# EAGLE board LilyPad_XBee-Panel-v10 (EAGLE 6.5.0)
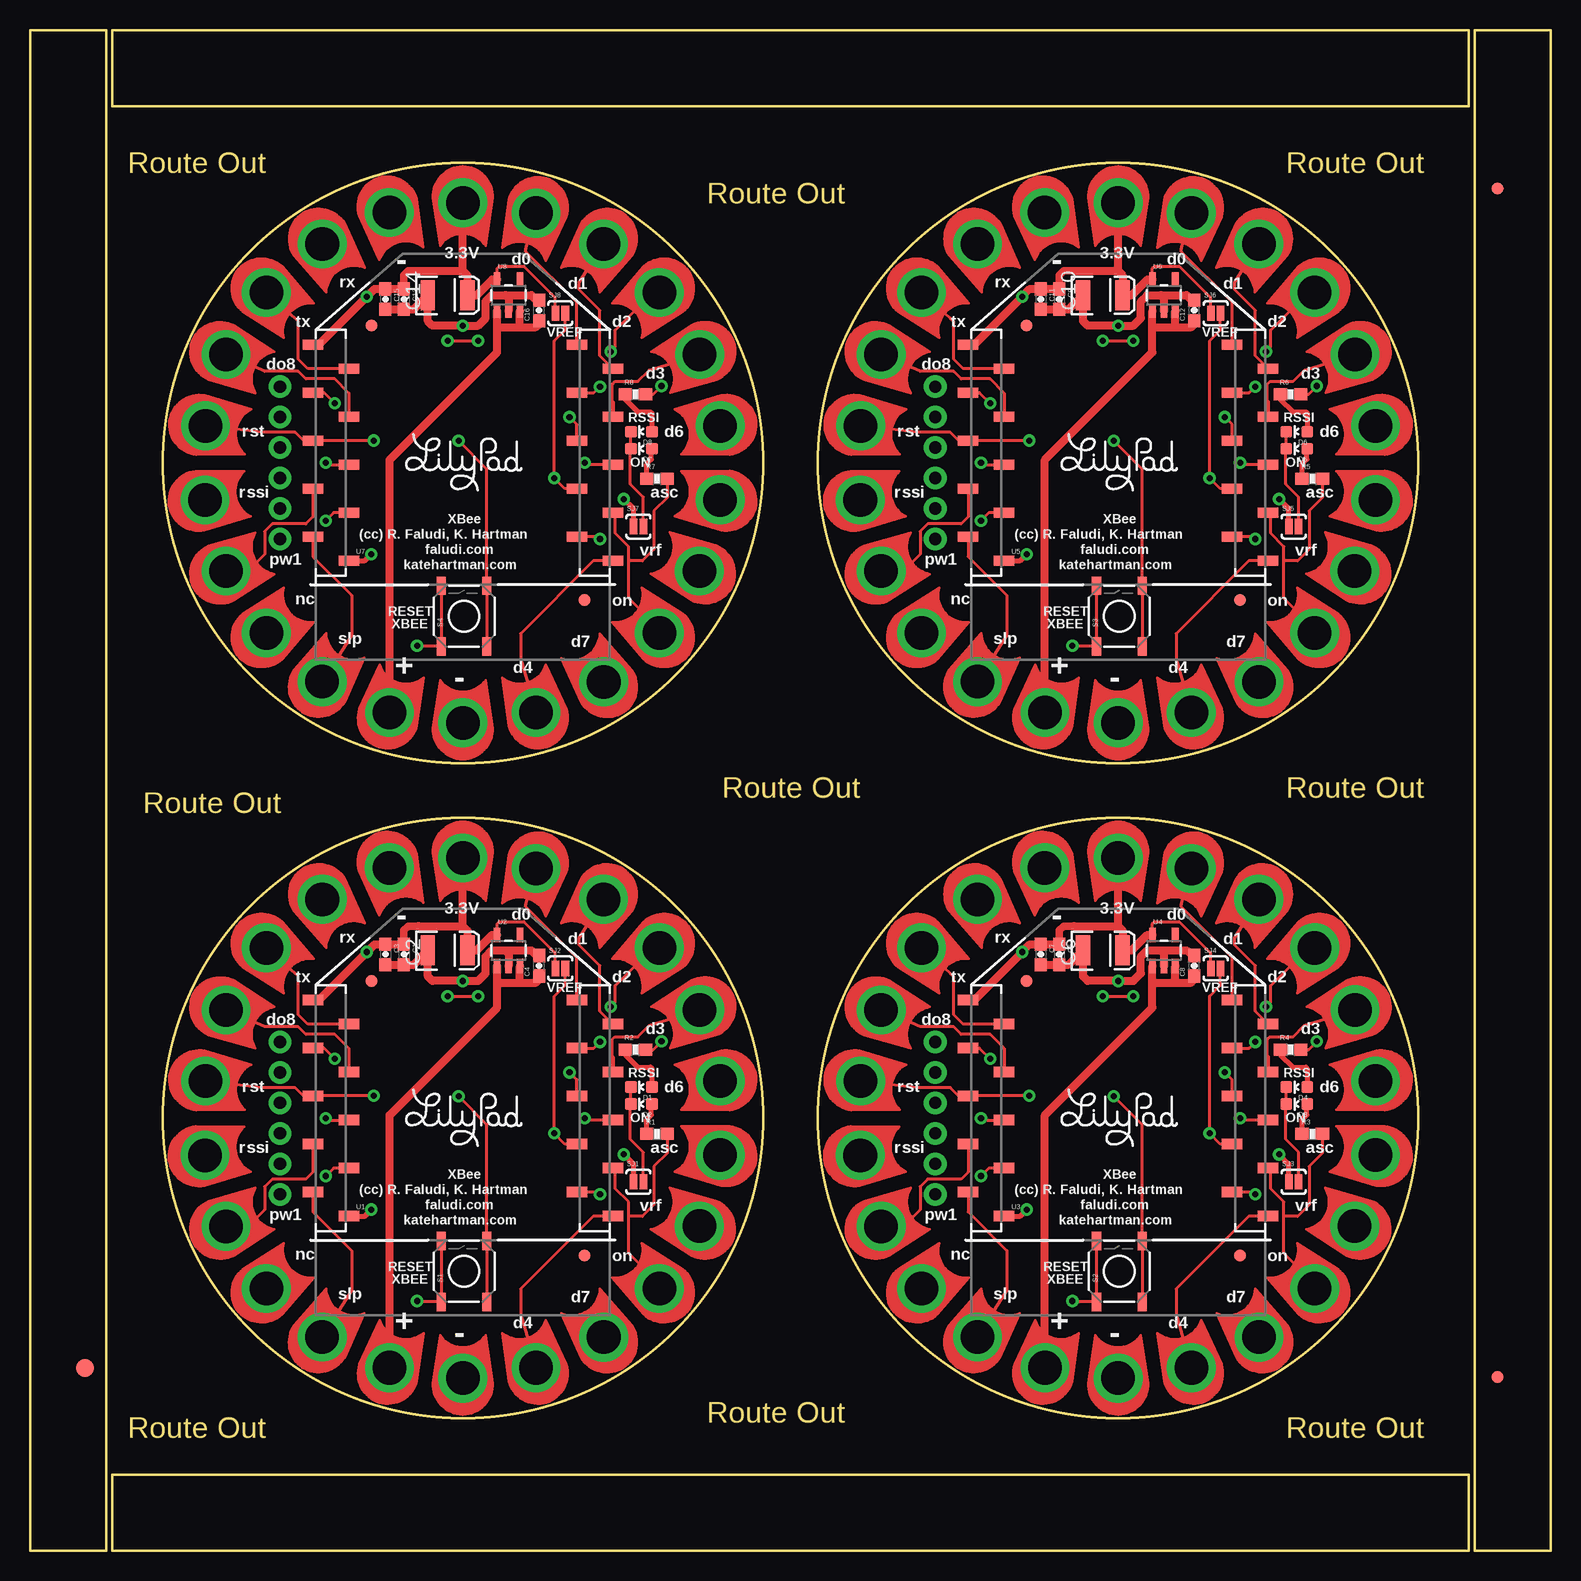
[diagram p0: board, top side]
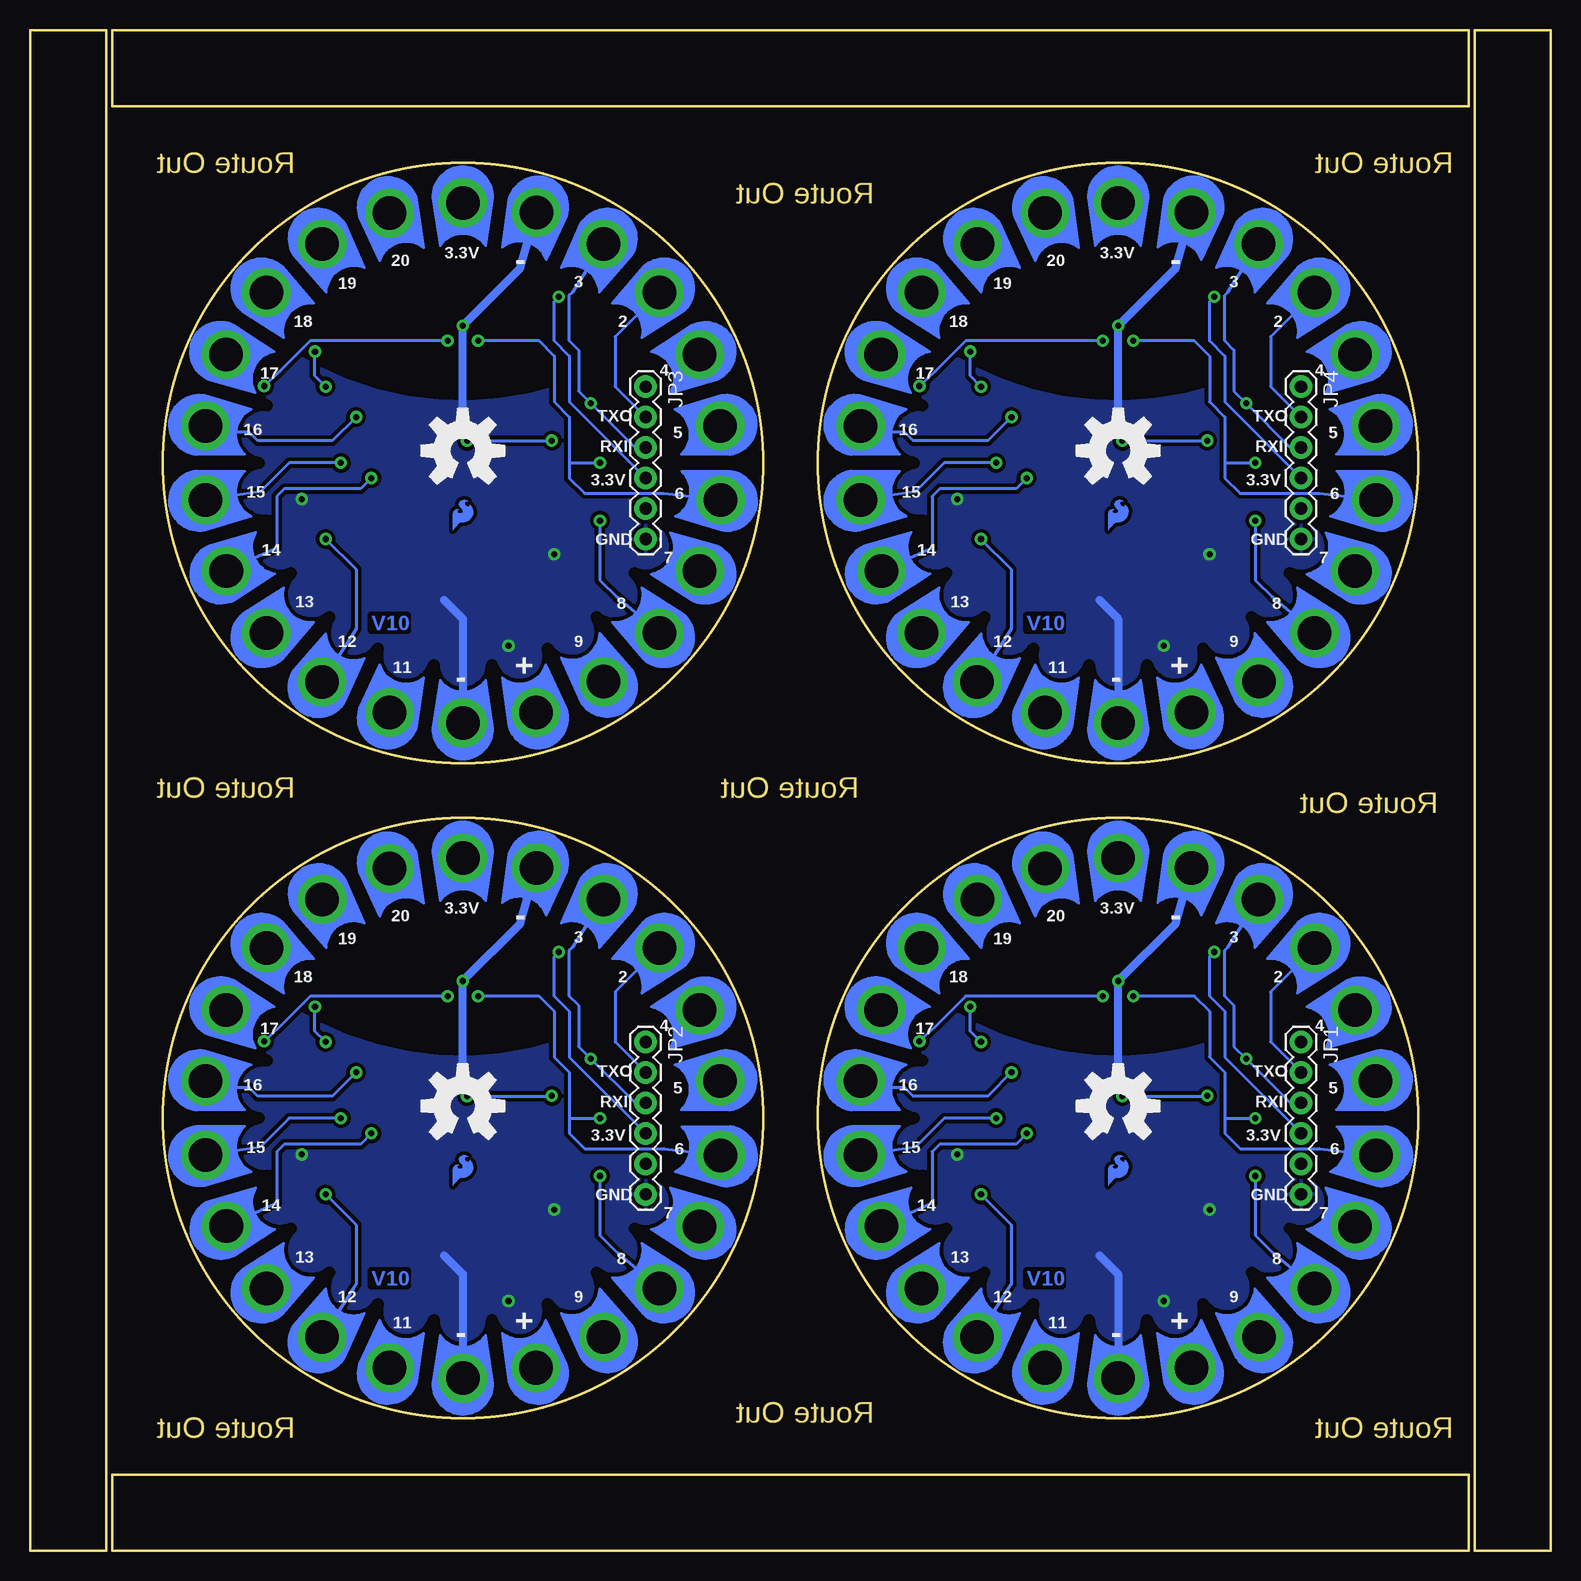
[diagram p1: board, bottom side, seen from below]

Size 126.75 x 126.75 mm. Coordinates in mm from the lower left corner, seen from the top.
Outline: 6.35,0 6.35,126.75 0,126.75 0,0 6.35,0
Outline: 6.86,0 119.89,0 119.89,6.35 6.86,6.35 6.86,0
Outline: 126.75,0 126.75,126.75 120.4,126.75 120.4,0 126.75,0
Outline: 119.89,126.75 6.86,126.75 6.86,120.4 119.89,120.4 119.89,126.75
Outline: circle at 36.07,36.07 radius 25
Outline: circle at 90.68,36.07 radius 25
Outline: circle at 90.68,90.68 radius 25
Outline: circle at 36.07,90.68 radius 25
Copper layers (1*16): Top 0.035mm / dielectric 1.5mm / Bottom 0.035mm
Design rules "SparkFun-2-layer": minimum track width 7mil, minimum drill 15mil, track to track 8mil, track to pad 8mil, pad to pad 8mil, via to via 8mil, smd to smd 8mil, copper to edge 8mil, drill to drill 8mil, minimum pad ring 12mil, minimum via ring 10mil, stop-mask expansion 4mil, vias tented up to drill 20mil, thermal gap 10mil
Net classes: 0 Default: width 0.203 mm; 1 VCC: width 0.305 mm
bRestrict: area 13.5,13.5 to 58.6,58.6; area 32.1,53.9 to 34.6,55.1; area 42.7,52.4 to 45.5,54.1; area 47.4,49.5 to 50,51.8; area 51.1,45.2 to 53.1,48; area 53.3,40.3 to 54.7,42.9; area 53.9,35 to 55.1,37.3; area 53.3,29.3 to 54.8,32; area 47.4,20.5 to 50.1,22.8; area 42.8,18.1 to 45.6,19.8; area 37.6,17.1 to 40,18.4; area 32.2,17.1 to 34.7,18.4; 80 more areas; 88 lines

## Footprints (pad centres in the part's own frame; a part is rotated, then mirrored left to right if it is on the bottom)
0603-CAP = smd 1.1 x 1: 1 -0.85,0; 2 0.85,0
EIA3528 = smd 1.2 x 2.5: A 1.65,0; C -1.65,0
LED-0603 = smd 1 x 1: A 0,-0.877; C 0,0.877
FIDUCIAL-1.5X3 = smd 1.5 x 1.5: 1 0,0
FIDUCIAL-1X2 = smd 1 x 1: 1 0,0
PETAL-LONG-1-2SIDE = drill 2.794 pad 4.064: 1 0.03,0
1X06 = drill 1.016 pad 1.88: 1 0,0; 2 2.54,0; 3 5.08,0; 4 7.62,0; 5 10.16,0; 6 12.7,0
0603-RES = smd 1.1 x 1: 1 -0.85,0; 2 0.85,0
TACTILE_SWITCH_SMD = smd 1.524 x 0.762: 1 -2.54,1.905; 2 2.54,1.905; 3 -2.54,-1.905; 4 2.54,-1.905
SJ_2S-NOTRACE = smd 0.635 x 1.27: 1 -0.401,0; 2 0.413,0
XBEE-SMD = smd 1.7 x 0.85: 1 -12.5,20; 2 -9.5,18; 3 -12.5,16; 4 -9.5,14; 5 -12.5,12; 6 -9.5,10; 7 -12.5,8; 8 -9.5,6; 9 -12.5,4; 10 -9.5,2; 11 12.5,2; 12 9.5,4; 13 12.5,6; 14 9.5,8; 15 12.5,10; 16 9.5,12; 17 12.5,14; 18 9.5,16; 19 12.5,18; 20 9.5,20
SOT23-5 = smd 0.55 x 1.2: 1 -0.95,-1.3; 2 0,-1.3; 3 0.95,-1.3; 4 0.95,1.3; 5 -0.95,1.3

## Placement (x,y rotation side)
C1  0.1uF  [0603-CAP]  31.17,49.71 270 top
C2  47uF  [EIA3528]  34.8,50.04 0 top
C3  1.0uF  [0603-CAP]  29.62,49.71 270 top
C4  1.0uF  [0603-CAP]  42.42,48.77 90 top
C5  0.1uF  [0603-CAP]  85.78,49.71 270 top
C6  47uF  [EIA3528]  89.41,50.04 0 top
C7  1.0uF  [0603-CAP]  84.23,49.71 270 top
C8  1.0uF  [0603-CAP]  97.03,48.77 90 top
C9  0.1uF  [0603-CAP]  85.78,104.32 270 top
C10  47uF  [EIA3528]  89.41,104.65 0 top
C11  1.0uF  [0603-CAP]  84.23,104.32 270 top
C12  1.0uF  [0603-CAP]  97.03,103.38 90 top
C13  0.1uF  [0603-CAP]  31.17,104.32 270 top
C14  47uF  [EIA3528]  34.8,104.65 0 top
C15  1.0uF  [0603-CAP]  29.62,104.32 270 top
C16  1.0uF  [0603-CAP]  42.42,103.38 90 top
D1  Status  [LED-0603]  50.95,38.66 90 top
D2  Status  [LED-0603]  50.95,37.24 90 top
D3  Status  [LED-0603]  105.56,37.24 90 top
D4  Status  [LED-0603]  105.56,38.66 90 top
D5  Status  [LED-0603]  105.56,91.85 90 top
D6  Status  [LED-0603]  105.56,93.27 90 top
D7  Status  [LED-0603]  50.95,91.85 90 top
D8  Status  [LED-0603]  50.95,93.27 90 top
E$1  [FIDUCIAL-1.5X3]  4.57,15.24 0 top
E$4  [FIDUCIAL-1X2]  122.3,14.48 0 top
E$6  [FIDUCIAL-1X2]  122.3,113.54 180 top
FID1  FIDUCIAL1X2  [FIDUCIAL-1X2]  28.45,47.5 0 top
FID2  FIDUCIAL1X2  [FIDUCIAL-1X2]  46.23,24.64 0 top
FID3  FIDUCIAL1X2  [FIDUCIAL-1X2]  83.06,47.5 0 top
FID4  FIDUCIAL1X2  [FIDUCIAL-1X2]  100.84,24.64 0 top
FID5  FIDUCIAL1X2  [FIDUCIAL-1X2]  83.06,102.11 0 top
FID6  FIDUCIAL1X2  [FIDUCIAL-1X2]  100.84,79.25 0 top
FID7  FIDUCIAL1X2  [FIDUCIAL-1X2]  28.45,102.11 0 top
FID8  FIDUCIAL1X2  [FIDUCIAL-1X2]  46.23,79.25 0 top
GND  SEWTAP9  [PETAL-LONG-1-2SIDE]  14.59,39.16 351.8 top
GND1  SEWTAP9  [PETAL-LONG-1-2SIDE]  69.2,39.16 351.8 top
GND2  SEWTAP9  [PETAL-LONG-1-2SIDE]  69.2,93.77 351.8 top
GND3  SEWTAP9  [PETAL-LONG-1-2SIDE]  14.59,93.77 351.8 top
JP1  [1X06]  20.83,42.42 270 bottom
JP2  [1X06]  75.44,42.42 270 bottom
JP3  [1X06]  75.44,97.03 270 bottom
JP4  [1X06]  20.83,97.03 270 bottom
LOGO1  SFE_LOGO_FLAME.1COP  [SFE_LOGO_FLAME_COPPER_.1]  37.21,30.1 0 bottom
LOGO2  SFE_LOGO_FLAME.1COP  [SFE_LOGO_FLAME_COPPER_.1]  91.82,30.1 0 bottom
LOGO3  SFE_LOGO_FLAME.1COP  [SFE_LOGO_FLAME_COPPER_.1]  91.82,84.71 0 bottom
LOGO4  SFE_LOGO_FLAME.1COP  [SFE_LOGO_FLAME_COPPER_.1]  37.21,84.71 0 bottom
R1  330  [0603-RES]  52.25,34.75 0 top
R2  330  [0603-RES]  50.44,41.78 0 top
R3  330  [0603-RES]  106.86,34.75 0 top
R4  330  [0603-RES]  105.05,41.78 0 top
R5  330  [0603-RES]  106.86,89.36 0 top
R6  330  [0603-RES]  105.05,96.39 0 top
R7  330  [0603-RES]  52.25,89.36 0 top
R8  330  [0603-RES]  50.44,96.39 0 top
S1  [TACTILE_SWITCH_SMD]  36.17,23.29 90 top
S2  [TACTILE_SWITCH_SMD]  90.78,23.29 90 top
S3  [TACTILE_SWITCH_SMD]  90.78,77.9 90 top
S4  [TACTILE_SWITCH_SMD]  36.17,77.9 90 top
SJ1  [SJ_2S-NOTRACE]  50.7,30.76 0 top
SJ2  [SJ_2S-NOTRACE]  44.2,48.54 0 top
SJ3  [SJ_2S-NOTRACE]  105.31,30.76 0 top
SJ4  [SJ_2S-NOTRACE]  98.81,48.54 0 top
SJ5  [SJ_2S-NOTRACE]  105.31,85.37 0 top
SJ6  [SJ_2S-NOTRACE]  98.81,103.15 0 top
SJ7  [SJ_2S-NOTRACE]  50.7,85.37 0 top
SJ8  [SJ_2S-NOTRACE]  44.2,103.15 0 top
U1  XBEE-1B3  [XBEE-SMD]  36.07,25.91 0 top
U2  V_REG_LDOSMD  [SOT23-5]  39.88,50.04 0 top
U3  XBEE-1B3  [XBEE-SMD]  90.68,25.91 0 top
U4  V_REG_LDOSMD  [SOT23-5]  94.49,50.04 0 top
U5  XBEE-1B3  [XBEE-SMD]  90.68,80.52 0 top
U6  V_REG_LDOSMD  [SOT23-5]  94.49,104.65 0 top
U7  XBEE-1B3  [XBEE-SMD]  36.07,80.52 0 top
U8  V_REG_LDOSMD  [SOT23-5]  39.88,104.65 0 top
U$1  LOGO-LPLP  [LOGO-LILYPAD]  36.2,36.45 0 top
U$2  [OSHW-LOGO-L]  36.07,37.08 0 bottom
U$3  SEWTAP9  [PETAL-LONG-1-2SIDE]  112.16,39.16 188.2 top
U$4  SEWTAP9  [PETAL-LONG-1-2SIDE]  57.55,32.98 171.8 top
U$5  SEWTAP9  [PETAL-LONG-1-2SIDE]  110.45,45.11 204.5 top
U$6  SEWTAP9  [PETAL-LONG-1-2SIDE]  107.08,50.28 220.9 top
U$7  SEWTAP9  [PETAL-LONG-1-2SIDE]  102.42,54.33 237.3 top
U$8  SEWTAP9  [PETAL-LONG-1-2SIDE]  96.79,56.9 253.7 top
U$9  SEWTAP9  [PETAL-LONG-1-2SIDE]  84.57,15.24 73.7 top
U$10  SEWTAP9  [PETAL-LONG-1-2SIDE]  90.68,14.37 90 top
U$11  SEWTAP9  [PETAL-LONG-1-2SIDE]  96.79,15.24 106.3 top
U$12  SEWTAP9  [PETAL-LONG-1-2SIDE]  102.44,17.79 122.7 top
U$13  SEWTAP9  [PETAL-LONG-1-2SIDE]  107.08,21.86 139.1 top
U$14  SEWTAP9  [PETAL-LONG-1-2SIDE]  110.42,27.05 155.5 top
U$15  SEWTAP9  [PETAL-LONG-1-2SIDE]  74.28,21.86 40.9 top
U$16  SEWTAP9  [PETAL-LONG-1-2SIDE]  70.91,27.04 24.5 top
U$17  SEWTAP9  [PETAL-LONG-1-2SIDE]  70.91,45.1 335.5 top
U$18  SEWTAP9  [PETAL-LONG-1-2SIDE]  74.28,50.28 319.1 top
U$19  SEWTAP9  [PETAL-LONG-1-2SIDE]  78.95,54.33 302.7 top
U$20  SEWTAP9  [PETAL-LONG-1-2SIDE]  84.55,56.96 286.3 top
U$21  SEWTAP9  [PETAL-LONG-1-2SIDE]  90.68,57.77 270 top
U$22  SEWTAP9  [PETAL-LONG-1-2SIDE]  78.94,17.81 57.3 top
U$23  SEWTAP9  [PETAL-LONG-1-2SIDE]  69.16,32.97 8.2 top
U$24  SEWTAP9  [PETAL-LONG-1-2SIDE]  112.16,32.98 171.8 top
U$25  LOGO-LPLP  [LOGO-LILYPAD]  90.81,36.45 0 top
U$26  [OSHW-LOGO-L]  90.68,37.08 0 bottom
U$27  SEWTAP9  [PETAL-LONG-1-2SIDE]  112.16,93.77 188.2 top
U$28  SEWTAP9  [PETAL-LONG-1-2SIDE]  110.45,99.72 204.5 top
U$29  SEWTAP9  [PETAL-LONG-1-2SIDE]  107.08,104.89 220.9 top
U$30  SEWTAP9  [PETAL-LONG-1-2SIDE]  57.55,39.16 188.2 top
U$31  SEWTAP9  [PETAL-LONG-1-2SIDE]  55.84,45.11 204.5 top
U$32  SEWTAP9  [PETAL-LONG-1-2SIDE]  52.47,50.28 220.9 top
U$33  SEWTAP9  [PETAL-LONG-1-2SIDE]  47.81,54.33 237.3 top
U$34  SEWTAP9  [PETAL-LONG-1-2SIDE]  42.18,56.9 253.7 top
U$35  SEWTAP9  [PETAL-LONG-1-2SIDE]  29.96,15.24 73.7 top
U$36  SEWTAP9  [PETAL-LONG-1-2SIDE]  36.07,14.37 90 top
U$37  SEWTAP9  [PETAL-LONG-1-2SIDE]  42.18,15.24 106.3 top
U$38  SEWTAP9  [PETAL-LONG-1-2SIDE]  47.83,17.79 122.7 top
U$39  SEWTAP9  [PETAL-LONG-1-2SIDE]  52.47,21.86 139.1 top
U$40  SEWTAP9  [PETAL-LONG-1-2SIDE]  55.81,27.05 155.5 top
U$41  SEWTAP9  [PETAL-LONG-1-2SIDE]  19.67,21.86 40.9 top
U$42  SEWTAP9  [PETAL-LONG-1-2SIDE]  16.3,27.04 24.5 top
U$43  SEWTAP9  [PETAL-LONG-1-2SIDE]  16.3,45.1 335.5 top
U$44  SEWTAP9  [PETAL-LONG-1-2SIDE]  19.67,50.28 319.1 top
U$45  SEWTAP9  [PETAL-LONG-1-2SIDE]  24.34,54.33 302.7 top
U$46  SEWTAP9  [PETAL-LONG-1-2SIDE]  29.94,56.96 286.3 top
U$47  SEWTAP9  [PETAL-LONG-1-2SIDE]  36.07,57.77 270 top
U$48  SEWTAP9  [PETAL-LONG-1-2SIDE]  24.33,17.81 57.3 top
U$49  SEWTAP9  [PETAL-LONG-1-2SIDE]  102.42,108.94 237.3 top
U$50  SEWTAP9  [PETAL-LONG-1-2SIDE]  96.79,111.51 253.7 top
U$51  SEWTAP9  [PETAL-LONG-1-2SIDE]  14.55,32.97 8.2 top
U$52  SEWTAP9  [PETAL-LONG-1-2SIDE]  84.57,69.85 73.7 top
U$53  SEWTAP9  [PETAL-LONG-1-2SIDE]  90.68,68.98 90 top
U$54  SEWTAP9  [PETAL-LONG-1-2SIDE]  96.79,69.85 106.3 top
U$55  SEWTAP9  [PETAL-LONG-1-2SIDE]  102.44,72.4 122.7 top
U$56  SEWTAP9  [PETAL-LONG-1-2SIDE]  107.08,76.47 139.1 top
U$57  SEWTAP9  [PETAL-LONG-1-2SIDE]  110.42,81.66 155.5 top
U$58  SEWTAP9  [PETAL-LONG-1-2SIDE]  74.28,76.47 40.9 top
U$59  SEWTAP9  [PETAL-LONG-1-2SIDE]  70.91,81.65 24.5 top
U$60  SEWTAP9  [PETAL-LONG-1-2SIDE]  70.91,99.71 335.5 top
U$61  SEWTAP9  [PETAL-LONG-1-2SIDE]  74.28,104.89 319.1 top
U$62  SEWTAP9  [PETAL-LONG-1-2SIDE]  78.95,108.94 302.7 top
U$63  SEWTAP9  [PETAL-LONG-1-2SIDE]  84.55,111.57 286.3 top
U$64  SEWTAP9  [PETAL-LONG-1-2SIDE]  90.68,112.38 270 top
U$65  SEWTAP9  [PETAL-LONG-1-2SIDE]  78.94,72.42 57.3 top
U$66  SEWTAP9  [PETAL-LONG-1-2SIDE]  69.16,87.58 8.2 top
U$67  SEWTAP9  [PETAL-LONG-1-2SIDE]  112.16,87.59 171.8 top
U$68  LOGO-LPLP  [LOGO-LILYPAD]  90.81,91.06 0 top
U$69  [OSHW-LOGO-L]  90.68,91.69 0 bottom
U$70  SEWTAP9  [PETAL-LONG-1-2SIDE]  57.55,93.77 188.2 top
U$71  SEWTAP9  [PETAL-LONG-1-2SIDE]  55.84,99.72 204.5 top
U$72  SEWTAP9  [PETAL-LONG-1-2SIDE]  52.47,104.89 220.9 top
U$73  SEWTAP9  [PETAL-LONG-1-2SIDE]  47.81,108.94 237.3 top
U$74  SEWTAP9  [PETAL-LONG-1-2SIDE]  42.18,111.51 253.7 top
U$75  SEWTAP9  [PETAL-LONG-1-2SIDE]  29.96,69.85 73.7 top
U$76  SEWTAP9  [PETAL-LONG-1-2SIDE]  36.07,68.98 90 top
U$77  SEWTAP9  [PETAL-LONG-1-2SIDE]  42.18,69.85 106.3 top
U$78  SEWTAP9  [PETAL-LONG-1-2SIDE]  47.83,72.4 122.7 top
U$79  SEWTAP9  [PETAL-LONG-1-2SIDE]  52.47,76.47 139.1 top
U$80  SEWTAP9  [PETAL-LONG-1-2SIDE]  55.81,81.66 155.5 top
U$81  SEWTAP9  [PETAL-LONG-1-2SIDE]  19.67,76.47 40.9 top
U$82  SEWTAP9  [PETAL-LONG-1-2SIDE]  16.3,81.65 24.5 top
U$83  SEWTAP9  [PETAL-LONG-1-2SIDE]  16.3,99.71 335.5 top
U$84  SEWTAP9  [PETAL-LONG-1-2SIDE]  19.67,104.89 319.1 top
U$85  SEWTAP9  [PETAL-LONG-1-2SIDE]  24.34,108.94 302.7 top
U$86  SEWTAP9  [PETAL-LONG-1-2SIDE]  29.94,111.57 286.3 top
U$87  SEWTAP9  [PETAL-LONG-1-2SIDE]  36.07,112.38 270 top
U$88  SEWTAP9  [PETAL-LONG-1-2SIDE]  24.33,72.42 57.3 top
U$89  SEWTAP9  [PETAL-LONG-1-2SIDE]  14.55,87.58 8.2 top
U$90  SEWTAP9  [PETAL-LONG-1-2SIDE]  57.55,87.59 171.8 top
U$91  LOGO-LPLP  [LOGO-LILYPAD]  36.2,91.06 0 top
U$92  [OSHW-LOGO-L]  36.07,91.69 0 bottom

## Library data of the parts
C1 C5 C9 C13 = SparkFun-Capacitors; PROD_ID: CAP-00810
C2 C6 C10 C14 JP1-JP4 SJ1-SJ8 U1-U8 = SparkFun
C3 C4 C7 C8 C11 C12 C15 C16 = SparkFun-Capacitors; PROD_ID: CAP-00868
D1 D4 D6 D8 = SparkFun-LED; PROD_ID: DIO-00821
D2 D3 D5 D7 = SparkFun-LED; PROD_ID: DIO-00819
E$1 = SparkFun-Retired
E$4 E$6 FID1-FID8 LOGO1-LOGO4 U$2 U$26 U$69 U$92 = SparkFun-Aesthetics
GND GND1-GND3 U$1 U$3-U$25 U$27-U$68 U$70-U$91 = LilyPad-Wearables
R1-R8 = SparkFun-Resistors; PROD_ID: RES-00818
S1-S4 = SparkFun-Electromechanical; PROD_ID: SWCH-08247

## Nets
3.3V: C1.1 C2.A C3.1 JP1.4 SJ2.1 U1.1 U2.5 U$47.1
3.3V1: C5.1 C6.A C7.1 JP2.4 SJ4.1 U3.1 U4.5 U$21.1
3.3V2: C9.1 C10.A C11.1 JP3.4 SJ6.1 U5.1 U6.5 U$64.1
3.3V3: C13.1 C14.A C15.1 JP4.4 SJ8.1 U7.1 U8.5 U$87.1
CTS: U1.12 U$38.1
CTS1: U3.12 U$12.1
CTS2: U5.12 U$55.1
CTS3: U7.12 U$78.1
D0: U1.20 U$34.1
D1: U1.19 U$33.1
D2: U1.18 U$32.1
D3: U1.17 U$31.1
D4: U1.11 U$37.1
D5: U1.15 U$4.1
D6: U3.4 U$17.1
D7: U3.7 U$16.1
D8: U3.11 U$11.1
D9: U3.15 U$24.1
D10: U3.17 U$5.1
D11: U1.7 U$42.1
D12: U1.4 U$43.1
D13: U3.18 U$6.1
D14: U3.19 U$7.1
D15: U3.20 U$8.1
D16: U5.4 U$60.1
D17: U5.7 U$59.1
D18: U5.11 U$54.1
D19: U5.15 U$67.1
D20: U5.17 U$28.1
D21: U5.18 U$29.1
D22: U5.19 U$49.1
D23: U5.20 U$50.1
D24: U7.4 U$83.1
D25: U7.7 U$82.1
D26: U7.11 U$77.1
D27: U7.15 U$90.1
D28: U7.17 U$71.1
D29: U7.18 U$72.1
D30: U7.19 U$73.1
D31: U7.20 U$74.1
DTR: U1.9 U$48.1
DTR1: U3.9 U$22.1
DTR2: U5.9 U$65.1
DTR3: U7.9 U$88.1
GND [VCC]: C1.2 C2.C C3.2 C4.2 JP1.6 S1.1 S1.2 SJ1.1 U1.10 U2.2 U$36.1 U$46.1
GND1 [VCC]: C5.2 C6.C C7.2 C8.2 JP2.6 S2.1 S2.2 SJ3.1 U3.10 U4.2 U$10.1 U$20.1
GND2 [VCC]: C9.2 C10.C C11.2 C12.2 JP3.6 S3.1 S3.2 SJ5.1 U5.10 U6.2 U$53.1 U$63.1
GND3 [VCC]: C13.2 C14.C C15.2 C16.2 JP4.6 S4.1 S4.2 SJ7.1 U7.10 U8.2 U$76.1 U$86.1
N$1: D1.A R2.1
N$2: D2.A R1.1
N$3: D1.C D2.C SJ1.2
N$4: D3.A R3.1
N$5: D4.A R4.1
N$6: D3.C D4.C SJ3.2
N$7: D5.A R5.1
N$8: D6.A R6.1
N$9: D5.C D6.C SJ5.2
N$10: D7.A R7.1
N$11: D8.A R8.1
N$12: D7.C D8.C SJ7.2
ON: R1.2 U1.13 U$39.1
ON1: R3.2 U3.13 U$13.1
ON2: R5.2 U5.13 U$56.1
ON3: R7.2 U7.13 U$79.1
RES: U1.8 U$41.1
RES1: U3.8 U$15.1
RES2: U5.8 U$58.1
RES3: U7.8 U$81.1
RESET: GND.1 S1.3 S1.4 U1.5
RESET1: GND1.1 S2.3 S2.4 U3.5
RESET2: GND2.1 S3.3 S3.4 U5.5
RESET3: GND3.1 S4.3 S4.4 U7.5
RSSI: R2.2 U1.6 U$51.1
RSSI1: R4.2 U3.6 U$23.1
RSSI2: R6.2 U5.6 U$66.1
RSSI3: R8.2 U7.6 U$89.1
RTS: U1.16 U$30.1
RTS1: U3.16 U$3.1
RTS2: U5.16 U$27.1
RTS3: U7.16 U$70.1
RX-I: JP1.3 U1.3 U$45.1
RX-I1: JP2.3 U3.3 U$19.1
RX-I2: JP3.3 U5.3 U$62.1
RX-I3: JP4.3 U7.3 U$85.1
TX-O: JP1.2 U1.2 U$44.1
TX-O1: JP2.2 U3.2 U$18.1
TX-O2: JP3.2 U5.2 U$61.1
TX-O3: JP4.2 U7.2 U$84.1
VCC [VCC]: C4.1 U2.1 U2.3 U$35.1
VCC1 [VCC]: C8.1 U4.1 U4.3 U$9.1
VCC2 [VCC]: C12.1 U6.1 U6.3 U$52.1
VCC3 [VCC]: C16.1 U8.1 U8.3 U$75.1
VREF: SJ2.2 U1.14 U$40.1
VREF1: SJ4.2 U3.14 U$14.1
VREF2: SJ6.2 U5.14 U$57.1
VREF3: SJ8.2 U7.14 U$80.1

## Tracks (layer width: path | path; a pad name or v marks a point on that pad's centre or on a via)
3.3V  (via drill 0.51)
  Top 0.254: U2.5 38.93,52.26 39.12,52.45 41.15,52.45 43.75,49.85 43.75,48.59 SJ2.1
  Top 0.61: 32.38,52.07 31.52,52.07 31.17,51.71 C1.1
  Top 0.66: C2.A 36.32,50.04 | U2.5 38.51,51.34 37.21,50.04 C2.A | C2.A 36.45,51.69 36.07,52.07 | 32.38,52.07 36.07,52.07 | 36.07,52.07 U$47.1 | U1.1 24.06,45.91 v28.07,49.91 28.71,50.56 C3.1 C1.1
  Bottom 0.254: JP1.4 27.18,41.15 27.18,44.96 28.45,46.23 28.45,49.53 v28.07,49.91
3.3V1  (via drill 0.51)
  Top 0.254: U4.5 93.54,52.26 93.73,52.45 95.76,52.45 98.36,49.85 98.36,48.59 SJ4.1
  Top 0.61: 87,52.07 86.13,52.07 85.78,51.71 C5.1
  Top 0.66: C6.A 90.93,50.04 | U4.5 93.12,51.34 91.82,50.04 C6.A | C6.A 91.06,51.69 90.68,52.07 | 87,52.07 90.68,52.07 | 90.68,52.07 U$21.1 | U3.1 78.67,45.91 v82.68,49.91 83.32,50.56 C7.1 C5.1
  Bottom 0.254: JP2.4 81.79,41.15 81.79,44.96 83.06,46.23 83.06,49.53 v82.68,49.91
3.3V2  (via drill 0.51)
  Top 0.254: U6.5 93.54,106.87 93.73,107.06 95.76,107.06 98.36,104.46 98.36,103.2 SJ6.1
  Top 0.61: 87,106.68 86.13,106.68 85.78,106.32 C9.1
  Top 0.66: C10.A 90.93,104.65 | U6.5 93.12,105.95 91.82,104.65 C10.A | C10.A 91.06,106.3 90.68,106.68 | 87,106.68 90.68,106.68 | 90.68,106.68 U$64.1 | U5.1 78.67,100.52 v82.68,104.52 83.32,105.17 C11.1 C9.1
  Bottom 0.254: JP3.4 81.79,95.76 81.79,99.57 83.06,100.84 83.06,104.14 v82.68,104.52
3.3V3  (via drill 0.51)
  Top 0.254: U8.5 38.93,106.87 39.12,107.06 41.15,107.06 43.75,104.46 43.75,103.2 SJ8.1
  Top 0.61: 32.38,106.68 31.52,106.68 31.17,106.32 C13.1
  Top 0.66: C14.A 36.32,104.65 | U8.5 38.51,105.95 37.21,104.65 C14.A | C14.A 36.45,106.3 36.07,106.68 | 32.38,106.68 36.07,106.68 | 36.07,106.68 U$87.1 | U7.1 24.06,100.52 v28.07,104.52 28.71,105.17 C15.1 C13.1
  Bottom 0.254: JP4.4 27.18,95.76 27.18,99.57 28.45,100.84 28.45,104.14 v28.07,104.52
CTS  (via drill 0.51)
  Top 0.254: U1.12 47.31,29.91 v47.5,29.72
  Bottom 0.254: U$38.1 45.21,21.84 44.96,22.22 44.96,27.18 v47.5,29.72
CTS1  (via drill 0.51)
  Top 0.254: U3.12 101.92,29.91 v102.11,29.72
  Bottom 0.254: U$12.1 99.82,21.84 99.57,22.22 99.57,27.18 v102.11,29.72
CTS2  (via drill 0.51)
  Top 0.254: U5.12 101.92,84.52 v102.11,84.33
  Bottom 0.254: U$55.1 99.82,76.45 99.57,76.84 99.57,81.79 v102.11,84.33
CTS3  (via drill 0.51)
  Top 0.254: U7.12 47.31,84.52 v47.5,84.33
  Bottom 0.254: U$78.1 45.21,76.45 44.96,76.84 44.96,81.79 v47.5,84.33
D0
  Top 0.254: U$34.1 41.33,53.87 41.33,53.67 45.57,49.43 U1.20
D1
  Top 0.254: U$33.1 45.77,51.1 45.77,50.5 47.5,48.77 47.5,44.98 U1.19
D2  (via drill 0.51)
  Top 0.254: U1.18 46.99,41.91 v47.5,42.42 | U$32.1 51.91,50.26 48.77,47.12 48.77,45.72 v48.39,45.34
  Bottom 0.254: v47.5,42.42 48.39,43.31 v48.39,45.34
D3
  Top 0.254: 48.51,41.15 48.51,42.62 48.74,42.85 50.65,42.85 51.59,43.79 U$31.1
  Top 0.406: 48.51,41.15 48.51,39.96 U1.17
D4
  Top 0.254: U$37.1 40.89,19.68 40.89,21.84 46.96,27.91 U1.11
D5  (via drill 0.51)
  Top 0.254: U1.15 46.39,35.91 v46.23,36.07
  Bottom 0.254: U$4.1 52.96,33.66 50.55,36.07 v46.23,36.07
D6
  Top 0.254: U$17.1 74.17,43.69 76.96,43.69 77.6,43.05 80.01,43.05 81.18,41.88 U3.4
D7
  Top 0.254: U3.7 78.18,31.57 77.6,30.99 74.8,30.99 74.17,30.35 74.17,28.45 72.77,27.05 U$16.1
D8
  Top 0.254: U$11.1 95.5,19.68 95.5,21.84 101.57,27.91 U3.11
D9  (via drill 0.51)
  Top 0.254: U3.15 101,35.91 v100.84,36.07
  Bottom 0.254: U$24.1 107.57,33.66 105.16,36.07 v100.84,36.07
D10
  Top 0.254: 103.12,41.15 103.12,42.62 103.35,42.85 105.26,42.85 106.2,43.79 U$5.1
  Top 0.406: 103.12,41.15 103.12,39.96 U3.17
D11
  Top 0.254: U1.7 23.57,31.57 22.99,30.99 20.19,30.99 19.56,30.35 19.56,28.45 18.16,27.05 U$42.1
D12
  Top 0.254: U$43.1 19.56,43.69 22.35,43.69 22.99,43.05 25.4,43.05 26.57,41.88 U1.4
D13  (via drill 0.51)
  Top 0.254: U3.18 101.6,41.91 v102.11,42.42 | U$6.1 106.52,50.26 103.38,47.12 103.38,45.72 v103,45.34
  Bottom 0.254: v102.11,42.42 103,43.31 v103,45.34
D14
  Top 0.254: U$7.1 100.38,51.1 100.38,50.5 102.11,48.77 102.11,44.98 U3.19
D15
  Top 0.254: U$8.1 95.94,53.87 95.94,53.67 100.18,49.43 U3.20
D16
  Top 0.254: U$60.1 74.17,98.3 76.96,98.3 77.6,97.66 80.01,97.66 81.18,96.5 U5.4
D17
  Top 0.254: U5.7 78.18,86.18 77.6,85.6 74.8,85.6 74.17,84.96 74.17,83.06 72.77,81.66 U$59.1
D18
  Top 0.254: U$54.1 95.5,74.29 95.5,76.45 101.57,82.52 U5.11
D19  (via drill 0.51)
  Top 0.254: U5.15 101,90.52 v100.84,90.68
  Bottom 0.254: U$67.1 107.57,88.27 105.16,90.68 v100.84,90.68
D20
  Top 0.254: 103.12,95.76 103.12,97.23 103.35,97.46 105.26,97.46 106.2,98.4 U$28.1
  Top 0.406: 103.12,95.76 103.12,94.57 U5.17
D21  (via drill 0.51)
  Top 0.254: U5.18 101.6,96.52 v102.11,97.03 | U$29.1 106.52,104.87 103.38,101.73 103.38,100.33 v103,99.95
  Bottom 0.254: v102.11,97.03 103,97.92 v103,99.95
D22
  Top 0.254: U$49.1 100.38,105.71 100.38,105.11 102.11,103.38 102.11,99.59 U5.19
D23
  Top 0.254: U$50.1 95.94,108.48 95.94,108.28 100.18,104.04 U5.20
D24
  Top 0.254: U$83.1 19.56,98.3 22.35,98.3 22.99,97.66 25.4,97.66 26.57,96.5 U7.4
D25
  Top 0.254: U7.7 23.57,86.18 22.99,85.6 20.19,85.6 19.56,84.96 19.56,83.06 18.16,81.66 U$82.1
D26
  Top 0.254: U$77.1 40.89,74.29 40.89,76.45 46.96,82.52 U7.11
D27  (via drill 0.51)
  Top 0.254: U7.15 46.39,90.52 v46.23,90.68
  Bottom 0.254: U$90.1 52.96,88.27 50.55,90.68 v46.23,90.68
D28
  Top 0.254: 48.51,95.76 48.51,97.23 48.74,97.46 50.65,97.46 51.59,98.4 U$71.1
  Top 0.406: 48.51,95.76 48.51,94.57 U7.17
D29  (via drill 0.51)
  Top 0.254: U7.18 46.99,96.52 v47.5,97.03 | U$72.1 51.91,104.87 48.77,101.73 48.77,100.33 v48.39,99.95
  Bottom 0.254: v47.5,97.03 48.39,97.92 v48.39,99.95
D30
  Top 0.254: U$73.1 45.77,105.71 45.77,105.11 47.5,103.38 47.5,99.59 U7.19
D31
  Top 0.254: U$74.1 41.33,108.48 41.33,108.28 45.57,104.04 U7.20
DTR
  Top 0.254: U$48.1 26.8,21.72 26.8,25.02 23.57,28.25 U1.9
DTR1
  Top 0.254: U$22.1 81.41,21.72 81.41,25.02 78.18,28.25 U3.9
DTR2
  Top 0.254: U$65.1 81.41,76.33 81.41,79.63 78.18,82.86 U5.9
DTR3
  Top 0.254: U$88.1 26.8,76.33 26.8,79.63 23.57,82.86 U7.9
GND  (via drill 0.51)
  Top 0.254: v32.26,20.83 34.19,20.83 S1.1 S1.2
  Top 0.406: U1.10 27.91,27.91 v28.45,28.45 | SJ1.1 50.3,32.23 v49.48,33.04
  Top 0.66: C2.C | U2.2 39.88,49.78 39.62,50.04 | 39.62,50.04 38.48,50.04 37.97,49.53 37.97,48.13 37.34,47.5 v36.07,47.5 33.53,47.5 33.15,47.88 C2.C | C4.2 42.42,49.4 41.78,50.04 39.62,50.04 | C3.2 C1.2 31.97,48.86 C2.C
  Bottom 0.66: 36.07,39.88 v36.07,47.5 31.24,52.32 31.24,52.45 U$46.1 | U$36.1 36.07,23.07 37.64,24.64
  pour Bottom (isolate 0.305): 10.07,63.34 arc159 62.07,62.07 62.07,10.07 10.07,10.07
GND1  (via drill 0.51)
  Top 0.254: v86.87,20.83 88.8,20.83 S2.1 S2.2
  Top 0.406: U3.10 82.52,27.91 v83.06,28.45 | SJ3.1 104.91,32.23 v104.09,33.04
  Top 0.66: C6.C | U4.2 94.49,49.78 94.23,50.04 | 94.23,50.04 93.09,50.04 92.58,49.53 92.58,48.13 91.95,47.5 v90.68,47.5 88.14,47.5 87.76,47.88 C6.C | C8.2 97.03,49.4 96.39,50.04 94.23,50.04 | C7.2 C5.2 86.58,48.86 C6.C
  Bottom 0.66: 90.68,39.88 v90.68,47.5 85.85,52.32 85.85,52.45 U$20.1 | U$10.1 90.68,23.07 92.25,24.64
  pour Bottom (isolate 0.305): 64.68,63.34 arc159 116.68,62.07 116.68,10.07 64.68,10.07
GND2  (via drill 0.51)
  Top 0.254: v86.87,75.44 88.8,75.44 S3.1 S3.2
  Top 0.406: U5.10 82.52,82.52 v83.06,83.06 | SJ5.1 104.91,86.84 v104.09,87.66
  Top 0.66: C10.C | U6.2 94.49,104.39 94.23,104.65 | 94.23,104.65 93.09,104.65 92.58,104.14 92.58,102.74 91.95,102.11 v90.68,102.11 88.14,102.11 87.76,102.49 C10.C | C12.2 97.03,104.01 96.39,104.65 94.23,104.65 | C11.2 C9.2 86.58,103.47 C10.C
  Bottom 0.66: 90.68,94.49 v90.68,102.11 85.85,106.93 85.85,107.06 U$63.1 | U$53.1 90.68,77.68 92.25,79.25
  pour Bottom (isolate 0.305): 64.68,117.95 arc159 116.68,116.68 116.68,64.68 64.68,64.68
GND3  (via drill 0.51)
  Top 0.254: v32.26,75.44 34.19,75.44 S4.1 S4.2
  Top 0.406: U7.10 27.91,82.52 v28.45,83.06 | SJ7.1 50.3,86.84 v49.48,87.66
  Top 0.66: C14.C | U8.2 39.88,104.39 39.62,104.65 | 39.62,104.65 38.48,104.65 37.97,104.14 37.97,102.74 37.34,102.11 v36.07,102.11 33.53,102.11 33.15,102.49 C14.C | C16.2 42.42,104.01 41.78,104.65 39.62,104.65 | C15.2 C13.2 31.97,103.47 C14.C
  Bottom 0.66: 36.07,94.49 v36.07,102.11 31.24,106.93 31.24,107.06 U$86.1 | U$76.1 36.07,77.68 37.64,79.25
  pour Bottom (isolate 0.305): 10.07,117.95 arc159 62.07,116.68 62.07,64.68 10.07,64.68
N$1
  Top 0.406: R2.1 49.59,41.36 50.65,40.31 51.71,40.31 51.82,40.21 51.82,38.67 D1.A
N$2
  Top 0.406: R1.1 51.4,35.95 51.79,36.35 51.79,37.2 D2.A
N$3
  Top 0.254: D1.C D2.C 50.04,37.2 50.04,34.29 51.11,33.22 SJ1.2
N$4
  Top 0.406: R3.1 106.01,35.95 106.4,36.35 106.4,37.2 D3.A
N$5
  Top 0.406: R4.1 104.2,41.36 105.26,40.31 106.32,40.31 106.43,40.21 106.43,38.67 D4.A
N$6
  Top 0.254: D4.C D3.C 104.65,37.2 104.65,34.29 105.72,33.22 SJ3.2
N$7
  Top 0.406: R5.1 106.01,90.56 106.4,90.96 106.4,91.81 D5.A
N$8
  Top 0.406: R6.1 104.2,95.97 105.26,94.92 106.32,94.92 106.43,94.82 106.43,93.28 D6.A
N$9
  Top 0.254: D6.C D5.C 104.65,91.81 104.65,88.9 105.72,87.83 SJ5.2
N$10
  Top 0.406: R7.1 51.4,90.56 51.79,90.96 51.79,91.81 D7.A
N$11
  Top 0.406: R8.1 49.59,95.97 50.65,94.92 51.71,94.92 51.82,94.82 51.82,93.28 D8.A
N$12
  Top 0.254: D8.C D7.C 50.04,91.81 50.04,88.9 51.11,87.83 SJ7.2
ON
  Top 0.254: U$39.1 52.44,22.23 49.89,24.79 49.89,27.89 | 49.89,27.89 49.89,29.08 48.77,30.2 48.77,31.71 U1.13 | R1.2 53.1,33.16 51.99,32.05 51.99,28.85 51.03,27.89 49.89,27.89
ON1
  Top 0.254: U$13.1 107.05,22.23 104.5,24.79 104.5,27.89 | 104.5,27.89 104.5,29.08 103.38,30.2 103.38,31.71 U3.13 | R3.2 107.71,33.16 106.6,32.05 106.6,28.85 105.64,27.89 104.5,27.89
ON2
  Top 0.254: U$56.1 107.05,76.84 104.5,79.4 104.5,82.5 | 104.5,82.5 104.5,83.69 103.38,84.81 103.38,86.32 U5.13 | R5.2 107.71,87.77 106.6,86.66 106.6,83.46 105.64,82.5 104.5,82.5
ON3
  Top 0.254: U$79.1 52.44,76.84 49.89,79.4 49.89,82.5 | 49.89,82.5 49.89,83.69 48.77,84.81 48.77,86.32 U7.13 | R7.2 53.1,87.77 51.99,86.66 51.99,83.46 51.03,82.5 49.89,82.5
RES  (via drill 0.51)
  Top 0.254: U1.8 25.3,31.91 v24.64,31.24
  Bottom 0.254: U$41.1 23.24,24.89 24.64,26.29 v24.64,31.24
RES1  (via drill 0.51)
  Top 0.254: U3.8 79.91,31.91 v79.25,31.24
  Bottom 0.254: U$15.1 77.85,24.89 79.25,26.29 v79.25,31.24
RES2  (via drill 0.51)
  Top 0.254: U5.8 79.91,86.52 v79.25,85.85
  Bottom 0.254: U$58.1 77.85,79.5 79.25,80.9 v79.25,85.85
RES3  (via drill 0.51)
  Top 0.254: U7.8 25.3,86.52 v24.64,85.85
  Bottom 0.254: U$81.1 23.24,79.5 24.64,80.9 v24.64,85.85
RESET  (via drill 0.51)
  Top 0.254: GND.1 19.3,38.61 22.1,38.61 22.8,37.91 U1.5 23.58,37.92 v28.65,37.92 | S1.3 S1.4 38.07,35.53 v35.71,37.9
  Bottom 0.254: v35.71,37.9 28.68,37.9 v28.65,37.92
RESET1  (via drill 0.51)
  Top 0.254: GND1.1 73.91,38.61 76.71,38.61 77.41,37.91 U3.5 78.19,37.92 v83.26,37.92 | S2.3 S2.4 92.69,35.53 v90.32,37.9
  Bottom 0.254: v90.32,37.9 83.29,37.9 v83.26,37.92
RESET2  (via drill 0.51)
  Top 0.254: GND2.1 73.91,93.22 76.71,93.22 77.41,92.52 U5.5 78.19,92.53 v83.26,92.53 | S3.3 S3.4 92.69,90.14 v90.32,92.51
  Bottom 0.254: v90.32,92.51 83.29,92.51 v83.26,92.53
RESET3  (via drill 0.51)
  Top 0.254: GND3.1 19.3,93.22 22.1,93.22 22.8,92.52 U7.5 23.58,92.53 v28.65,92.53 | S4.3 S4.4 38.07,90.14 v35.71,92.51
  Bottom 0.254: v35.71,92.51 28.68,92.51 v28.65,92.53
RSSI  (via drill 0.51)
  Top 0.254: v34.8,46.23 v37.34,46.23 | U1.6 24.8,35.91 v24.64,36.07 | R2.2 51.94,41.78 v52.63,42.47
  Bottom 0.254: v52.63,42.47 51.31,43.69 48.77,46.23 v37.34,46.23 | v34.8,46.23 29.72,46.23 28.45,44.96 28.45,41.15 27.18,39.88 27.18,36.07 | U$51.1 19.3,33.53 25.91,33.53 27.18,34.8 27.18,36.07 | 27.18,36.07 v24.64,36.07
RSSI1  (via drill 0.51)
  Top 0.254: v89.41,46.23 v91.95,46.23 | U3.6 79.41,35.91 v79.25,36.07 | R4.2 106.55,41.78 v107.24,42.47
  Bottom 0.254: v107.24,42.47 105.92,43.69 103.38,46.23 v91.95,46.23 | v89.41,46.23 84.33,46.23 83.06,44.96 83.06,41.15 81.79,39.88 81.79,36.07 | U$23.1 73.91,33.53 80.52,33.53 81.79,34.8 81.79,36.07 | 81.79,36.07 v79.25,36.07
RSSI2  (via drill 0.51)
  Top 0.254: v89.41,100.84 v91.95,100.84 | U5.6 79.41,90.52 v79.25,90.68 | R6.2 106.55,96.39 v107.24,97.08
  Bottom 0.254: v107.24,97.08 105.92,98.3 103.38,100.84 v91.95,100.84 | v89.41,100.84 84.33,100.84 83.06,99.57 83.06,95.76 81.79,94.49 81.79,90.68 | U$66.1 73.91,88.14 80.52,88.14 81.79,89.41 81.79,90.68 | 81.79,90.68 v79.25,90.68
RSSI3  (via drill 0.51)
  Top 0.254: v34.8,100.84 v37.34,100.84 | U7.6 24.8,90.52 v24.64,90.68 | R8.2 51.94,96.39 v52.63,97.08
  Bottom 0.254: v52.63,97.08 51.31,98.3 48.77,100.84 v37.34,100.84 | v34.8,100.84 29.72,100.84 28.45,99.57 28.45,95.76 27.18,94.49 27.18,90.68 | U$89.1 19.3,88.14 25.91,88.14 27.18,89.41 27.18,90.68 | 27.18,90.68 v24.64,90.68
RTS  (via drill 0.51)
  Top 0.254: U1.16 45.57,39.27 v44.96,39.88
  Bottom 0.254: v44.96,39.88 46.93,37.91 53.15,37.91 53.85,38.61 56.97,38.61 U$30.1
RTS1  (via drill 0.51)
  Top 0.254: U3.16 100.18,39.27 v99.57,39.88
  Bottom 0.254: v99.57,39.88 101.54,37.91 107.76,37.91 108.46,38.61 111.58,38.61 U$3.1
RTS2  (via drill 0.51)
  Top 0.254: U5.16 100.18,93.88 v99.57,94.49
  Bottom 0.254: v99.57,94.49 101.54,92.52 107.76,92.52 108.46,93.22 111.58,93.22 U$27.1
RTS3  (via drill 0.51)
  Top 0.254: U7.16 45.57,93.88 v44.96,94.49
  Bottom 0.254: v44.96,94.49 46.93,92.52 53.15,92.52 53.85,93.22 56.97,93.22 U$70.1
RX-I  (via drill 0.51)
  Top 0.254: U1.3 24.51,41.91 v25.4,41.02
  Bottom 0.254: U$45.1 26.92,50.29 27.18,50.04 27.18,46.23 26.42,45.47 26.42,42.04 v25.4,41.02 21.72,37.34 JP1.3
RX-I1  (via drill 0.51)
  Top 0.254: U3.3 79.12,41.91 v80.01,41.02
  Bottom 0.254: U$19.1 81.53,50.29 81.79,50.04 81.79,46.23 81.03,45.47 81.03,42.04 v80.01,41.02 76.33,37.34 JP2.3
RX-I2  (via drill 0.51)
  Top 0.254: U5.3 79.12,96.52 v80.01,95.63
  Bottom 0.254: U$62.1 81.53,104.9 81.79,104.65 81.79,100.84 81.03,100.08 81.03,96.65 v80.01,95.63 76.33,91.95 JP3.3
RX-I3  (via drill 0.51)
  Top 0.254: U7.3 24.51,96.52 v25.4,95.63
  Bottom 0.254: U$85.1 26.92,104.9 27.18,104.65 27.18,100.84 26.42,100.08 26.42,96.65 v25.4,95.63 21.72,91.95 JP4.3
TX-O
  Top 0.254: U$44.1 22.1,48.13 22.35,47.88 22.35,44.7 23.15,43.91 U1.2
  Bottom 0.254: JP1.2 23.37,42.42 23.37,46.58 U$44.1
TX-O1
  Top 0.254: U$18.1 76.71,48.13 76.96,47.88 76.96,44.7 77.76,43.91 U3.2
  Bottom 0.254: JP2.2 77.98,42.42 77.98,46.58 U$18.1
TX-O2
  Top 0.254: U$61.1 76.71,102.74 76.96,102.49 76.96,99.31 77.76,98.52 U5.2
  Bottom 0.254: JP3.2 77.98,97.03 77.98,101.19 U$61.1
TX-O3
  Top 0.254: U$84.1 22.1,102.74 22.35,102.49 22.35,99.31 23.15,98.52 U7.2
  Bottom 0.254: JP4.2 23.37,97.03 23.37,101.19 U$84.1
VCC
  Top 0.66: 38.93,47.37 38.93,45.28 29.97,36.32 U$35.1 | 38.93,47.37 U2.1 | 40.83,47.37 U2.3 | C4.1 42.42,47.62 42.16,47.37 40.83,47.37 | 38.93,47.37 40.83,47.37
VCC1
  Top 0.66: 93.54,47.37 93.54,45.28 84.58,36.32 U$9.1 | 93.54,47.37 U4.1 | 95.44,47.37 U4.3 | C8.1 97.03,47.62 96.77,47.37 95.44,47.37 | 93.54,47.37 95.44,47.37
VCC2
  Top 0.66: 93.54,101.98 93.54,99.89 84.58,90.93 U$52.1 | 93.54,101.98 U6.1 | 95.44,101.98 U6.3 | C12.1 97.03,102.23 96.77,101.98 95.44,101.98 | 93.54,101.98 95.44,101.98
VCC3
  Top 0.66: 38.93,101.98 38.93,99.89 29.97,90.93 U$75.1 | 38.93,101.98 U8.1 | 40.83,101.98 U8.3 | C16.1 42.42,102.23 42.16,101.98 40.83,101.98 | 38.93,101.98 40.83,101.98
VREF  (via drill 0.51)
  Top 0.254: U1.14 44.58,33.91 v43.69,34.8 43.69,46.23 44.6,47.14 44.6,48.53 SJ2.2
  Top 0.406: U1.14 45.85,33.91
  Bottom 0.254: U$40.1 51.56,28.96 51.56,33.27 50.93,33.91 44.58,33.91 v43.69,34.8
VREF1  (via drill 0.51)
  Top 0.254: U3.14 99.19,33.91 v98.3,34.8 98.3,46.23 99.21,47.14 99.21,48.53 SJ4.2
  Top 0.406: U3.14 100.46,33.91
  Bottom 0.254: U$14.1 106.17,28.96 106.17,33.27 105.54,33.91 99.19,33.91 v98.3,34.8
VREF2  (via drill 0.51)
  Top 0.254: U5.14 99.19,88.52 v98.3,89.41 98.3,100.84 99.21,101.75 99.21,103.14 SJ6.2
  Top 0.406: U5.14 100.46,88.52
  Bottom 0.254: U$57.1 106.17,83.57 106.17,87.88 105.54,88.52 99.19,88.52 v98.3,89.41
VREF3  (via drill 0.51)
  Top 0.254: U7.14 44.58,88.52 v43.69,89.41 43.69,100.84 44.6,101.75 44.6,103.14 SJ8.2
  Top 0.406: U7.14 45.85,88.52
  Bottom 0.254: U$80.1 51.56,83.57 51.56,87.88 50.93,88.52 44.58,88.52 v43.69,89.41

## Text on the board
Bottom: V10 | V10 | V10 | V10
Dimension: Route Out | Route Out | Route Out | Route Out | Route Out | Route Out | Route Out | Route Out | Route Out
tPlace: 3.3V | 3.3V | - | d0 | - | d0 | rx | d1 | rx | d1 | tx | VREF | d2 | tx | VREF | d2 | do8 | d3 | do8 | d3 | RSSI | RSSI | r | s | t | d6 | r | s | t | d6 | ON | ON | r | s | s | i | asc | r | s | s | i | asc | XBee | XBee | (cc) R. Faludi, K. Hartman | (cc) R. Faludi, K. Hartman | faludi.com | vrf | faludi.com | vrf | pw1 | katehartman.com | pw1 | katehartman.com | nc | on | nc | on | RESET | RESET | XBEE | XBEE | slp | d7 | slp | d7 | + | d4 | + | d4 | - | - | 3.3V | d0 | 3.3V | d0 | - | - | rx | rx | d1 | d1 | tx | VREF | d2 | tx | VREF | d2 | do8 | do8 | d3 | d3 | RSSI | RSSI | r | s | t | d6 | r | s | t | d6 | ON | ON | r | s | s | i | asc | r | s | s | i | asc | XBee | XBee | (cc) R. Faludi, K. Hartman | (cc) R. Faludi, K. Hartman | faludi.com | vrf | faludi.com | vrf | pw1 | katehartman.com | pw1 | katehartman.com | nc | on | nc | on | RESET | RESET | XBEE | XBEE | slp | d7 | slp | d7 | + | d4 | + | d4 | - | -
bPlace: 3.3V | 3.3V | - | 20 | - | 20 | 3 | 19 | 3 | 19 | 2 | 18 | 2 | 18 | 4 | 17 | 4 | 17 | TXO | TXO | 5 | 16 | 5 | 16 | RXI | RXI | 3.3V | 3.3V | 6 | 15 | 6 | 15 | GND | GND | 14 | 14 | 7 | 7 | 13 | 13 | 8 | 8 | 9 | 12 | 9 | 12 | + | 11 | + | 11 | - | - | 3.3V | 3.3V | - | 20 | - | 20 | 3 | 3 | 19 | 19 | 2 | 18 | 2 | 18 | 4 | 17 | 4 | 17 | TXO | TXO | 5 | 16 | 5 | 16 | RXI | RXI | 3.3V | 3.3V | 6 | 15 | 6 | 15 | GND | GND | 7 | 14 | 7 | 14 | 8 | 13 | 8 | 13 | 9 | 12 | 9 | 12 | + | 11 | + | 11 | - | -